# EAGLE board Adapter-CMRI8-line-stall-motor-adapter-array (EAGLE 7.7.0)
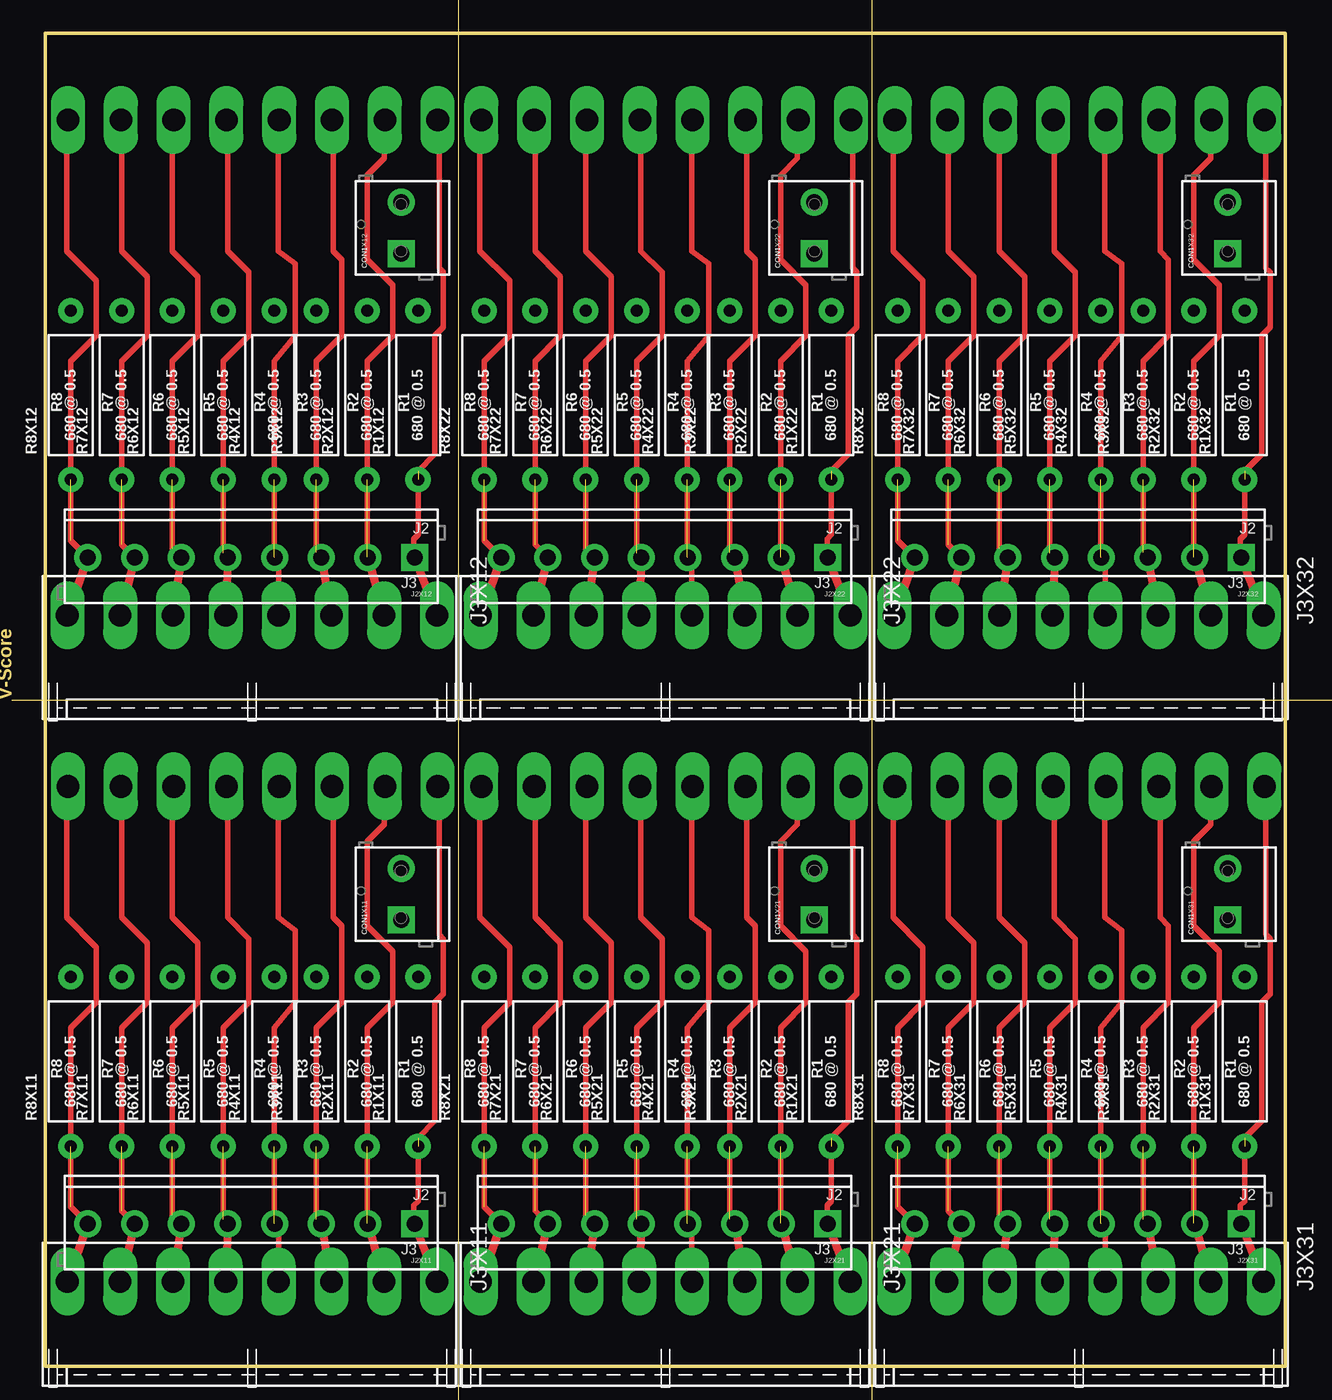
[diagram p0: board, top side]
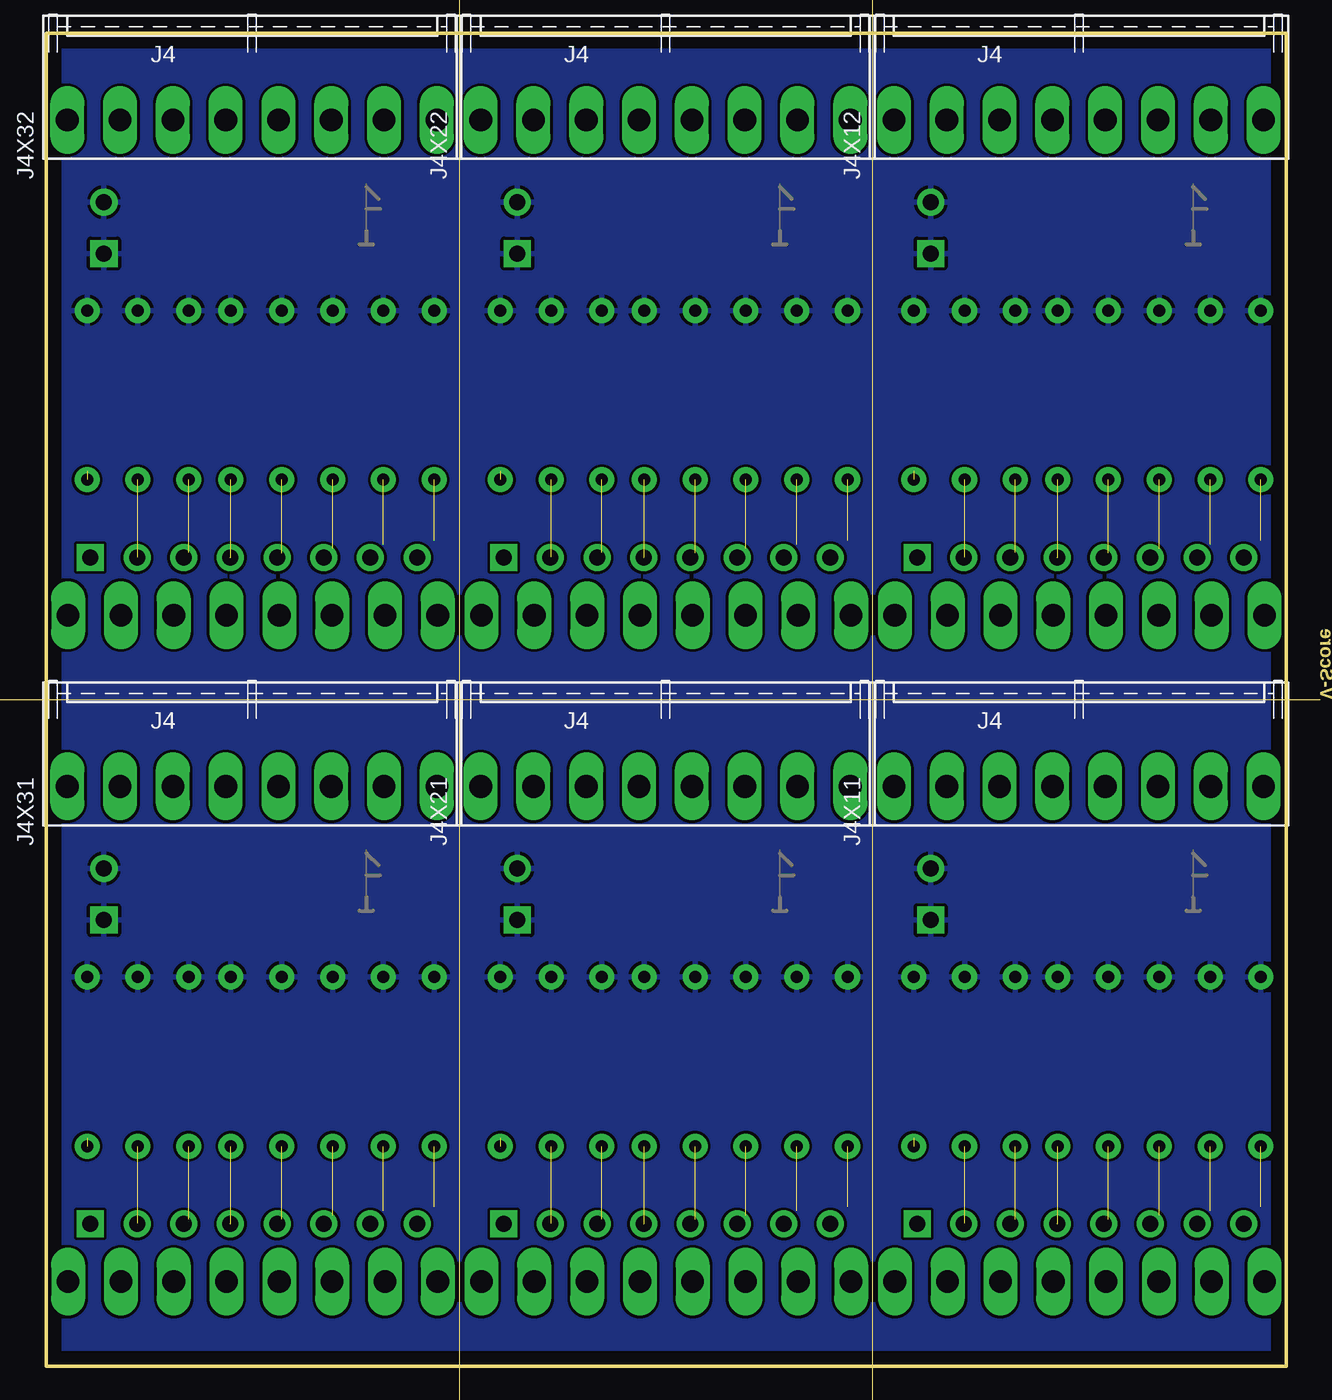
[diagram p1: board, bottom side, seen from below]

Size 93 x 100 mm. Coordinates in mm from the lower left corner, seen from the top.
Outline: 0,0 93,0 93,100 0,100 0,0
Copper layers (1*16): Top 0.035mm / dielectric 1.5mm / Bottom 0.035mm
Design rules "default": minimum track width 10mil, minimum drill 24mil, track to track 8mil, track to pad 8mil, pad to pad 8mil, via to via 8mil, smd to smd 8mil, copper to edge 40mil, drill to drill 8mil, minimum pad ring 10mil, minimum via ring 8mil, stop-mask expansion 4mil, vias tented up to drill 0mil, thermal gap 10mil
Milling: 3 lines

## Footprints (pad centres in the part's own frame; a part is rotated, then mirrored left to right if it is on the bottom)
SCREWTERMINAL-3.5MM-2_LOCK = drill 1.2 pad 2.032 square: 1 -0.178,0 | drill 1.2 pad 2.032: 2 3.678,0
SCREWTERMINAL-3.5MM-8 = drill 1.2 pad 2.032 square: 1 0,0 | drill 1.2 pad 2.032: 2 3.5,0; 3 7,0; 4 10.5,0; 5 14,0; 6 17.5,0; 7 21,0; 8 24.5,0
KK-156-8-F = drill 1.7 pad 2.184 long: 1 -13.86,0; 2 -9.9,0; 3 -5.94,0; 4 -1.98,0; 5 1.98,0; 6 5.94,0; 7 9.9,0; 8 13.86,0
AXIAL-0.5 = drill 0.9 pad 1.88: P$1 -6.35,0; P$2 6.35,0

## Placement (x,y rotation side)
CON1X11  12V  [SCREWTERMINAL-3.5MM-2_LOCK]  26.67,33.66 90 top
CON1X12  12V  [SCREWTERMINAL-3.5MM-2_LOCK]  26.67,83.66 90 top
CON1X21  12V  [SCREWTERMINAL-3.5MM-2_LOCK]  57.67,33.66 90 top
CON1X22  12V  [SCREWTERMINAL-3.5MM-2_LOCK]  57.67,83.66 90 top
CON1X31  12V  [SCREWTERMINAL-3.5MM-2_LOCK]  88.67,33.66 90 top
CON1X32  12V  [SCREWTERMINAL-3.5MM-2_LOCK]  88.67,83.66 90 top
J2X11  3.5mm  [SCREWTERMINAL-3.5MM-8]  27.69,10.67 180 top
J2X12  3.5mm  [SCREWTERMINAL-3.5MM-8]  27.69,60.67 180 top
J2X21  3.5mm  [SCREWTERMINAL-3.5MM-8]  58.69,10.67 180 top
J2X22  3.5mm  [SCREWTERMINAL-3.5MM-8]  58.69,60.67 180 top
J2X31  3.5mm  [SCREWTERMINAL-3.5MM-8]  89.69,10.67 180 top
J2X32  3.5mm  [SCREWTERMINAL-3.5MM-8]  89.69,60.67 180 top
J3X11  Molex Out  [KK-156-8-F]  15.5,6.35 180 top
J3X12  Molex Out  [KK-156-8-F]  15.5,56.35 180 top
J3X21  Molex Out  [KK-156-8-F]  46.5,6.35 180 top
J3X22  Molex Out  [KK-156-8-F]  46.5,56.35 180 top
J3X31  Molex Out  [KK-156-8-F]  77.5,6.35 180 top
J3X32  Molex Out  [KK-156-8-F]  77.5,56.35 180 top
J4X11  Molex In  [KK-156-8-F]  15.56,43.5 0 bottom
J4X12  Molex In  [KK-156-8-F]  15.56,93.5 0 bottom
J4X21  Molex In  [KK-156-8-F]  46.56,43.5 0 bottom
J4X22  Molex In  [KK-156-8-F]  46.56,93.5 0 bottom
J4X31  Molex In  [KK-156-8-F]  77.56,43.5 0 bottom
J4X32  Molex In  [KK-156-8-F]  77.56,93.5 0 bottom
R1X11  680 @ 0.5  [AXIAL-0.5]  27.94,22.86 90 top
R1X12  680 @ 0.5  [AXIAL-0.5]  27.94,72.86 90 top
R1X21  680 @ 0.5  [AXIAL-0.5]  58.94,22.86 90 top
R1X22  680 @ 0.5  [AXIAL-0.5]  58.94,72.86 90 top
R1X31  680 @ 0.5  [AXIAL-0.5]  89.94,22.86 90 top
R1X32  680 @ 0.5  [AXIAL-0.5]  89.94,72.86 90 top
R2X11  680 @ 0.5  [AXIAL-0.5]  24.13,22.86 90 top
R2X12  680 @ 0.5  [AXIAL-0.5]  24.13,72.86 90 top
R2X21  680 @ 0.5  [AXIAL-0.5]  55.13,22.86 90 top
R2X22  680 @ 0.5  [AXIAL-0.5]  55.13,72.86 90 top
R2X31  680 @ 0.5  [AXIAL-0.5]  86.13,22.86 90 top
R2X32  680 @ 0.5  [AXIAL-0.5]  86.13,72.86 90 top
R3X11  680 @ 0.5  [AXIAL-0.5]  20.32,22.86 90 top
R3X12  680 @ 0.5  [AXIAL-0.5]  20.32,72.86 90 top
R3X21  680 @ 0.5  [AXIAL-0.5]  51.32,22.86 90 top
R3X22  680 @ 0.5  [AXIAL-0.5]  51.32,72.86 90 top
R3X31  680 @ 0.5  [AXIAL-0.5]  82.32,22.86 90 top
R3X32  680 @ 0.5  [AXIAL-0.5]  82.32,72.86 90 top
R4X11  680 @ 0.5  [AXIAL-0.5]  17.14,22.86 90 top
R4X12  680 @ 0.5  [AXIAL-0.5]  17.14,72.86 90 top
R4X21  680 @ 0.5  [AXIAL-0.5]  48.15,22.86 90 top
R4X22  680 @ 0.5  [AXIAL-0.5]  48.15,72.86 90 top
R4X31  680 @ 0.5  [AXIAL-0.5]  79.14,22.86 90 top
R4X32  680 @ 0.5  [AXIAL-0.5]  79.14,72.86 90 top
R5X11  680 @ 0.5  [AXIAL-0.5]  13.34,22.86 90 top
R5X12  680 @ 0.5  [AXIAL-0.5]  13.34,72.86 90 top
R5X21  680 @ 0.5  [AXIAL-0.5]  44.34,22.86 90 top
R5X22  680 @ 0.5  [AXIAL-0.5]  44.34,72.86 90 top
R5X31  680 @ 0.5  [AXIAL-0.5]  75.33,22.86 90 top
R5X32  680 @ 0.5  [AXIAL-0.5]  75.33,72.86 90 top
R6X11  680 @ 0.5  [AXIAL-0.5]  9.53,22.86 90 top
R6X12  680 @ 0.5  [AXIAL-0.5]  9.53,72.86 90 top
R6X21  680 @ 0.5  [AXIAL-0.5]  40.52,22.86 90 top
R6X22  680 @ 0.5  [AXIAL-0.5]  40.52,72.86 90 top
R6X31  680 @ 0.5  [AXIAL-0.5]  71.53,22.86 90 top
R6X32  680 @ 0.5  [AXIAL-0.5]  71.53,72.86 90 top
R7X11  680 @ 0.5  [AXIAL-0.5]  5.71,22.86 90 top
R7X12  680 @ 0.5  [AXIAL-0.5]  5.71,72.86 90 top
R7X21  680 @ 0.5  [AXIAL-0.5]  36.72,22.86 90 top
R7X22  680 @ 0.5  [AXIAL-0.5]  36.72,72.86 90 top
R7X31  680 @ 0.5  [AXIAL-0.5]  67.72,22.86 90 top
R7X32  680 @ 0.5  [AXIAL-0.5]  67.72,72.86 90 top
R8X11  680 @ 0.5  [AXIAL-0.5]  1.91,22.86 90 top
R8X12  680 @ 0.5  [AXIAL-0.5]  1.91,72.86 90 top
R8X21  680 @ 0.5  [AXIAL-0.5]  32.91,22.86 90 top
R8X22  680 @ 0.5  [AXIAL-0.5]  32.91,72.86 90 top
R8X31  680 @ 0.5  [AXIAL-0.5]  63.91,22.86 90 top
R8X32  680 @ 0.5  [AXIAL-0.5]  63.91,72.86 90 top
U$1X11  [CA-PROP65WARNING]  19.05,21.59 0 top
U$1X12  [CA-PROP65WARNING]  19.05,71.59 0 top
U$1X21  [CA-PROP65WARNING]  50.05,21.59 0 top
U$1X22  [CA-PROP65WARNING]  50.05,71.59 0 top
U$1X31  [CA-PROP65WARNING]  81.05,21.59 0 top
U$1X32  [CA-PROP65WARNING]  81.05,71.59 0 top
U$2X11  [MRCSLOGOBTM]  0.64,33.66 0 top
U$2X12  [MRCSLOGOBTM]  0.64,83.66 0 top
U$2X21  [MRCSLOGOBTM]  31.64,33.66 0 top
U$2X22  [MRCSLOGOBTM]  31.64,83.66 0 top
U$2X31  [MRCSLOGOBTM]  62.63,33.66 0 top
U$2X32  [MRCSLOGOBTM]  62.63,83.66 0 top

## Library data of the parts
CON1X11 CON1X12 CON1X21 CON1X22 CON1X31 CON1X32 J2X11 J2X12 J2X21 J2X22 J2X31 J2X32 J3X11 J3X12 J3X21 J3X22 J3X31 J3X32 J4X11 J4X12 J4X21 J4X22 J4X31 J4X32 = SPCoast
R1X11 R1X12 R1X21 R1X22 R1X31 R1X32 R2X11 R2X12 R2X21 R2X22 R2X31 R2X32 R3X11 R3X12 R3X21 R3X22 R3X31 R3X32 R4X11 R4X12 R4X21 R4X22 R4X31 R4X32 R5X11 R5X12 R5X21 R5X22 R5X31 R5X32 R6X11 R6X12 R6X21 R6X22 R6X31 R6X32 R7X11 R7X12 R7X21 R7X22 R7X31 R7X32 R8X11 R8X12 R8X21 R8X22 R8X31 R8X32 = SparkFun-Resistors
U$1X11 U$1X12 U$1X21 U$1X22 U$1X31 U$1X32 = MRCS-prop65warningBtm
U$2X11 U$2X12 U$2X21 U$2X22 U$2X31 U$2X32 = MRCSLogoBtm

## Nets
L2X11: J2X11.2 J3X11.2 J4X11.2 R2X11.P$1
L2X12: J2X12.2 J3X12.2 J4X12.2 R2X12.P$1
L2X21: J2X21.2 J3X21.2 J4X21.2 R2X21.P$1
L2X22: J2X22.2 J3X22.2 J4X22.2 R2X22.P$1
L2X31: J2X31.2 J3X31.2 J4X31.2 R2X31.P$1
L2X32: J2X32.2 J3X32.2 J4X32.2 R2X32.P$1
L3X11: J2X11.3 J3X11.3 J4X11.3 R3X11.P$1
L3X12: J2X12.3 J3X12.3 J4X12.3 R3X12.P$1
L3X21: J2X21.3 J3X21.3 J4X21.3 R3X21.P$1
L3X22: J2X22.3 J3X22.3 J4X22.3 R3X22.P$1
L3X31: J2X31.3 J3X31.3 J4X31.3 R3X31.P$1
L3X32: J2X32.3 J3X32.3 J4X32.3 R3X32.P$1
L5X11: J2X11.5 J3X11.5 J4X11.5 R5X11.P$1
L5X12: J2X12.5 J3X12.5 J4X12.5 R5X12.P$1
L5X21: J2X21.5 J3X21.5 J4X21.5 R5X21.P$1
L5X22: J2X22.5 J3X22.5 J4X22.5 R5X22.P$1
L5X31: J2X31.5 J3X31.5 J4X31.5 R5X31.P$1
L5X32: J2X32.5 J3X32.5 J4X32.5 R5X32.P$1
L6X11: J2X11.6 J3X11.6 J4X11.6 R6X11.P$1
L6X12: J2X12.6 J3X12.6 J4X12.6 R6X12.P$1
L6X21: J2X21.6 J3X21.6 J4X21.6 R6X21.P$1
L6X22: J2X22.6 J3X22.6 J4X22.6 R6X22.P$1
L6X31: J2X31.6 J3X31.6 J4X31.6 R6X31.P$1
L6X32: J2X32.6 J3X32.6 J4X32.6 R6X32.P$1
L7X11: J2X11.7 J3X11.7 J4X11.7 R7X11.P$1
L7X12: J2X12.7 J3X12.7 J4X12.7 R7X12.P$1
L7X21: J2X21.7 J3X21.7 J4X21.7 R7X21.P$1
L7X22: J2X22.7 J3X22.7 J4X22.7 R7X22.P$1
L7X31: J2X31.7 J3X31.7 J4X31.7 R7X31.P$1
L7X32: J2X32.7 J3X32.7 J4X32.7 R7X32.P$1
L8X11: J2X11.8 J3X11.8 J4X11.8 R8X11.P$1
L8X12: J2X12.8 J3X12.8 J4X12.8 R8X12.P$1
L8X21: J2X21.8 J3X21.8 J4X21.8 R8X21.P$1
L8X22: J2X22.8 J3X22.8 J4X22.8 R8X22.P$1
L8X31: J2X31.8 J3X31.8 J4X31.8 R8X31.P$1
L8X32: J2X32.8 J3X32.8 J4X32.8 R8X32.P$1
N$1X11: J2X11.1 J3X11.1 J4X11.1 R1X11.P$1
N$1X12: J2X12.1 J3X12.1 J4X12.1 R1X12.P$1
N$1X21: J2X21.1 J3X21.1 J4X21.1 R1X21.P$1
N$1X22: J2X22.1 J3X22.1 J4X22.1 R1X22.P$1
N$1X31: J2X31.1 J3X31.1 J4X31.1 R1X31.P$1
N$1X32: J2X32.1 J3X32.1 J4X32.1 R1X32.P$1
N$8X11: J2X11.4 J3X11.4 J4X11.4 R4X11.P$1
N$8X12: J2X12.4 J3X12.4 J4X12.4 R4X12.P$1
N$8X21: J2X21.4 J3X21.4 J4X21.4 R4X21.P$1
N$8X22: J2X22.4 J3X22.4 J4X22.4 R4X22.P$1
N$8X31: J2X31.4 J3X31.4 J4X31.4 R4X31.P$1
N$8X32: J2X32.4 J3X32.4 J4X32.4 R4X32.P$1
VINX11: CON1X11.1 CON1X11.2 R1X11.P$2 R2X11.P$2 R3X11.P$2 R4X11.P$2 R5X11.P$2 R6X11.P$2 R7X11.P$2 R8X11.P$2
VINX12: CON1X12.1 CON1X12.2 R1X12.P$2 R2X12.P$2 R3X12.P$2 R4X12.P$2 R5X12.P$2 R6X12.P$2 R7X12.P$2 R8X12.P$2
VINX21: CON1X21.1 CON1X21.2 R1X21.P$2 R2X21.P$2 R3X21.P$2 R4X21.P$2 R5X21.P$2 R6X21.P$2 R7X21.P$2 R8X21.P$2
VINX22: CON1X22.1 CON1X22.2 R1X22.P$2 R2X22.P$2 R3X22.P$2 R4X22.P$2 R5X22.P$2 R6X22.P$2 R7X22.P$2 R8X22.P$2
VINX31: CON1X31.1 CON1X31.2 R1X31.P$2 R2X31.P$2 R3X31.P$2 R4X31.P$2 R5X31.P$2 R6X31.P$2 R7X31.P$2 R8X31.P$2
VINX32: CON1X32.1 CON1X32.2 R1X32.P$2 R2X32.P$2 R3X32.P$2 R4X32.P$2 R5X32.P$2 R6X32.P$2 R7X32.P$2 R8X32.P$2

## Tracks (layer width: path | path; a pad name or v marks a point on that pad's centre or on a via)
L2X11  (1 unrouted)
  Top 0.406: J2X11.2 24.13,10.72 24.13,25.4 26.04,27.3 26.04,31.11 24.13,33.02 24.13,39.37 25.4,40.64 25.4,43.44 J4X11.2
  Top 0.61: J2X11.2 J3X11.2
L2X12  (1 unrouted)
  Top 0.406: J2X12.2 24.13,60.72 24.13,75.4 26.04,77.31 26.04,81.11 24.13,83.02 24.13,89.37 25.4,90.64 25.4,93.44 J4X12.2
  Top 0.61: J2X12.2 J3X12.2
L2X21  (1 unrouted)
  Top 0.406: J2X21.2 55.13,10.72 55.13,25.4 57.03,27.3 57.03,31.11 55.13,33.02 55.13,39.37 56.4,40.64 56.4,43.44 J4X21.2
  Top 0.61: J2X21.2 J3X21.2
L2X22  (1 unrouted)
  Top 0.406: J2X22.2 55.13,60.72 55.13,75.4 57.03,77.31 57.03,81.11 55.13,83.02 55.13,89.37 56.4,90.64 56.4,93.44 J4X22.2
  Top 0.61: J2X22.2 J3X22.2
L2X31  (1 unrouted)
  Top 0.406: J2X31.2 86.13,10.72 86.13,25.4 88.03,27.3 88.03,31.11 86.13,33.02 86.13,39.37 87.4,40.64 87.4,43.44 J4X31.2
  Top 0.61: J2X31.2 J3X31.2
L2X32  (1 unrouted)
  Top 0.406: J2X32.2 86.13,60.72 86.13,75.4 88.03,77.31 88.03,81.11 86.13,83.02 86.13,89.37 87.4,90.64 87.4,93.44 J4X32.2
  Top 0.61: J2X32.2 J3X32.2
L3X11  (1 unrouted)
  Top 0.406: J2X11.3 20.32,11.03 20.32,25.4 22.23,27.3 22.23,33.02 21.59,33.66 21.59,43.41 J4X11.3
  Top 0.61: J2X11.3 J3X11.3
L3X12  (1 unrouted)
  Top 0.406: J2X12.3 20.32,61.03 20.32,75.4 22.23,77.31 22.23,83.02 21.59,83.66 21.59,93.41 J4X12.3
  Top 0.61: J2X12.3 J3X12.3
L3X21  (1 unrouted)
  Top 0.406: J2X21.3 51.32,11.03 51.32,25.4 53.23,27.3 53.23,33.02 52.59,33.66 52.59,43.41 J4X21.3
  Top 0.61: J2X21.3 J3X21.3
L3X22  (1 unrouted)
  Top 0.406: J2X22.3 51.32,61.03 51.32,75.4 53.23,77.31 53.23,83.02 52.59,83.66 52.59,93.41 J4X22.3
  Top 0.61: J2X22.3 J3X22.3
L3X31  (1 unrouted)
  Top 0.406: J2X31.3 82.32,11.03 82.32,25.4 84.22,27.3 84.22,33.02 83.59,33.66 83.59,43.41 J4X31.3
  Top 0.61: J2X31.3 J3X31.3
L3X32  (1 unrouted)
  Top 0.406: J2X32.3 82.32,61.03 82.32,75.4 84.22,77.31 84.22,83.02 83.59,83.66 83.59,93.41 J4X32.3
  Top 0.61: J2X32.3 J3X32.3
L5X11  (1 unrouted)
  Top 0.406: J2X11.5 13.34,11.02 13.34,25.4 15.24,27.3 15.24,32.07 13.65,33.66 13.65,43.42 J4X11.5
  Top 0.61: J2X11.5 J3X11.5
L5X12  (1 unrouted)
  Top 0.406: J2X12.5 13.34,61.02 13.34,75.4 15.24,77.31 15.24,82.07 13.65,83.66 13.65,93.42 J4X12.5
  Top 0.61: J2X12.5 J3X12.5
L5X21  (1 unrouted)
  Top 0.406: J2X21.5 44.34,11.02 44.34,25.4 46.24,27.3 46.24,32.07 44.65,33.66 44.65,43.42 J4X21.5
  Top 0.61: J2X21.5 J3X21.5
L5X22  (1 unrouted)
  Top 0.406: J2X22.5 44.34,61.02 44.34,75.4 46.24,77.31 46.24,82.07 44.65,83.66 44.65,93.42 J4X22.5
  Top 0.61: J2X22.5 J3X22.5
L5X31  (1 unrouted)
  Top 0.406: J2X31.5 75.33,11.02 75.33,25.4 77.24,27.3 77.24,32.07 75.65,33.66 75.65,43.42 J4X31.5
  Top 0.61: J2X31.5 J3X31.5
L5X32  (1 unrouted)
  Top 0.406: J2X32.5 75.33,61.02 75.33,75.4 77.24,77.31 77.24,82.07 75.65,83.66 75.65,93.42 J4X32.5
  Top 0.61: J2X32.5 J3X32.5
L6X11  (1 unrouted)
  Top 0.406: J2X11.6 9.53,11.33 9.53,25.4 11.43,27.3 11.43,31.75 9.53,33.66 9.53,43.41 J4X11.6
  Top 0.61: J2X11.6 J3X11.6
L6X12  (1 unrouted)
  Top 0.406: J2X12.6 9.53,61.33 9.53,75.4 11.43,77.31 11.43,81.75 9.53,83.66 9.53,93.41 J4X12.6
  Top 0.61: J2X12.6 J3X12.6
L6X21  (1 unrouted)
  Top 0.406: J2X21.6 40.52,11.33 40.52,25.4 42.43,27.3 42.43,31.75 40.52,33.66 40.52,43.41 J4X21.6
  Top 0.61: J2X21.6 J3X21.6
L6X22  (1 unrouted)
  Top 0.406: J2X22.6 40.52,61.33 40.52,75.4 42.43,77.31 42.43,81.75 40.52,83.66 40.52,93.41 J4X22.6
  Top 0.61: J2X22.6 J3X22.6
L6X31  (1 unrouted)
  Top 0.406: J2X31.6 71.53,11.33 71.53,25.4 73.43,27.3 73.43,31.75 71.53,33.66 71.53,43.41 J4X31.6
  Top 0.61: J2X31.6 J3X31.6
L6X32  (1 unrouted)
  Top 0.406: J2X32.6 71.53,61.33 71.53,75.4 73.43,77.31 73.43,81.75 71.53,83.66 71.53,93.41 J4X32.6
  Top 0.61: J2X32.6 J3X32.6
L7X11  (1 unrouted)
  Top 0.406: J2X11.7 5.71,11.64 5.71,25.4 7.62,27.3 7.62,31.75 5.71,33.66 5.71,43.44 J4X11.7
  Top 0.61: J2X11.7 J3X11.7
L7X12  (1 unrouted)
  Top 0.406: J2X12.7 5.71,61.64 5.71,75.4 7.62,77.31 7.62,81.75 5.71,83.66 5.71,93.44 J4X12.7
  Top 0.61: J2X12.7 J3X12.7
L7X21  (1 unrouted)
  Top 0.406: J2X21.7 36.72,11.64 36.72,25.4 38.62,27.3 38.62,31.75 36.72,33.66 36.72,43.44 J4X21.7
  Top 0.61: J2X21.7 J3X21.7
L7X22  (1 unrouted)
  Top 0.406: J2X22.7 36.72,61.64 36.72,75.4 38.62,77.31 38.62,81.75 36.72,83.66 36.72,93.44 J4X22.7
  Top 0.61: J2X22.7 J3X22.7
L7X31  (1 unrouted)
  Top 0.406: J2X31.7 67.72,11.64 67.72,25.4 69.62,27.3 69.62,31.75 67.72,33.66 67.72,43.44 J4X31.7
  Top 0.61: J2X31.7 J3X31.7
L7X32  (1 unrouted)
  Top 0.406: J2X32.7 67.72,61.64 67.72,75.4 69.62,77.31 69.62,81.75 67.72,83.66 67.72,93.44 J4X32.7
  Top 0.61: J2X32.7 J3X32.7
L8X11  (1 unrouted)
  Top 0.406: J2X11.8 1.91,11.95 1.91,25.4 3.81,27.3 3.81,31.43 1.59,33.66 1.59,43.39 J4X11.8
  Top 0.61: J2X11.8 J3X11.8
L8X12  (1 unrouted)
  Top 0.406: J2X12.8 1.91,61.95 1.91,75.4 3.81,77.31 3.81,81.43 1.59,83.66 1.59,93.39 J4X12.8
  Top 0.61: J2X12.8 J3X12.8
L8X21  (1 unrouted)
  Top 0.406: J2X21.8 32.91,11.95 32.91,25.4 34.81,27.3 34.81,31.43 32.59,33.66 32.59,43.39 J4X21.8
  Top 0.61: J2X21.8 J3X21.8
L8X22  (1 unrouted)
  Top 0.406: J2X22.8 32.91,61.95 32.91,75.4 34.81,77.31 34.81,81.43 32.59,83.66 32.59,93.39 J4X22.8
  Top 0.61: J2X22.8 J3X22.8
L8X31  (1 unrouted)
  Top 0.406: J2X31.8 63.91,11.95 63.91,25.4 65.81,27.3 65.81,31.43 63.59,33.66 63.59,43.39 J4X31.8
  Top 0.61: J2X31.8 J3X31.8
L8X32  (1 unrouted)
  Top 0.406: J2X32.8 63.91,61.95 63.91,75.4 65.81,77.31 65.81,81.43 63.59,83.66 63.59,93.39 J4X32.8
  Top 0.61: J2X32.8 J3X32.8
N$1X11  (1 unrouted)
  Top 0.406: J2X11.1 27.62,10.73 27.62,12.06 27.94,12.38 27.94,17.14 29.21,18.41 29.21,27.3 29.84,27.94 29.84,32.07 29.53,32.38 29.53,43.39 J4X11.1
  Top 0.61: J2X11.1 J3X11.1
N$1X12  (1 unrouted)
  Top 0.406: J2X12.1 27.62,60.73 27.62,62.06 27.94,62.38 27.94,67.14 29.21,68.42 29.21,77.31 29.84,77.94 29.84,82.07 29.53,82.39 29.53,93.39 J4X12.1
  Top 0.61: J2X12.1 J3X12.1
N$1X21  (1 unrouted)
  Top 0.406: J2X21.1 58.62,10.73 58.62,12.06 58.94,12.38 58.94,17.14 60.21,18.41 60.21,27.3 60.84,27.94 60.84,32.07 60.53,32.38 60.53,43.39 J4X21.1
  Top 0.61: J2X21.1 J3X21.1
N$1X22  (1 unrouted)
  Top 0.406: J2X22.1 58.62,60.73 58.62,62.06 58.94,62.38 58.94,67.14 60.21,68.42 60.21,77.31 60.84,77.94 60.84,82.07 60.53,82.39 60.53,93.39 J4X22.1
  Top 0.61: J2X22.1 J3X22.1
N$1X31  (1 unrouted)
  Top 0.406: J2X31.1 89.62,10.73 89.62,12.06 89.94,12.38 89.94,17.14 91.21,18.41 91.21,27.3 91.84,27.94 91.84,32.07 91.53,32.38 91.53,43.39 J4X31.1
  Top 0.61: J2X31.1 J3X31.1
N$1X32  (1 unrouted)
  Top 0.406: J2X32.1 89.62,60.73 89.62,62.06 89.94,62.38 89.94,67.14 91.21,68.42 91.21,77.31 91.84,77.94 91.84,82.07 91.53,82.39 91.53,93.39 J4X32.1
  Top 0.61: J2X32.1 J3X32.1
N$8X11  (2 unrouted)
  Top 0.406: J3X11.4 17.48,10.37 17.14,10.71 17.14,25.4 18.73,27.3 18.73,32.7 17.46,33.66 17.46,43.42 J4X11.4
N$8X12  (2 unrouted)
  Top 0.406: J3X12.4 17.48,60.37 17.14,60.71 17.14,75.4 18.73,77.31 18.73,82.7 17.46,83.66 17.46,93.42 J4X12.4
N$8X21  (2 unrouted)
  Top 0.406: J3X21.4 48.48,10.37 48.15,10.71 48.15,25.4 49.73,27.3 49.73,32.7 48.46,33.66 48.46,43.42 J4X21.4
N$8X22  (2 unrouted)
  Top 0.406: J3X22.4 48.48,60.37 48.15,60.71 48.15,75.4 49.73,77.31 49.73,82.7 48.46,83.66 48.46,93.42 J4X22.4
N$8X31  (2 unrouted)
  Top 0.406: J3X31.4 79.48,10.37 79.14,10.71 79.14,25.4 80.73,27.3 80.73,32.7 79.46,33.66 79.46,43.42 J4X31.4
N$8X32  (2 unrouted)
  Top 0.406: J3X32.4 79.48,60.37 79.14,60.71 79.14,75.4 80.73,77.31 80.73,82.7 79.46,83.66 79.46,93.42 J4X32.4
VINX11
  pour Bottom: 0,0 31.11,0 31.11,50.16 0,50.16
VINX12
  pour Bottom: 0,50 31.11,50 31.11,100.17 0,100.17
VINX21
  pour Bottom: 31,0 62.12,0 62.12,50.16 31,50.16
VINX22
  pour Bottom: 31,50 62.12,50 62.12,100.17 31,100.17
VINX31
  pour Bottom: 62,0 93.11,0 93.11,50.16 62,50.16
VINX32
  pour Bottom: 62,50 93.11,50 93.11,100.17 62,100.17

## Text on the board
Milling: V-Score | V-Score | V-Score
tDocu: CMRI 8 Line Stall / MotorAdapter / V 1.0 20211204 / Seth Neumann | CMRI 8 Line Stall / MotorAdapter / V 1.0 20211204 / Seth Neumann | CMRI 8 Line Stall / MotorAdapter / V 1.0 20211204 / Seth Neumann | 8 | 1 | 8 | 1 | 8 | 1 | 2021.02 | 2021.02 | 2021.02 | v1.0 | v1.0 | v1.0 | 0.100 | 0.100 | 0.100 | 3.5mm | 3.5mm | 3.5mm | 8 | 1 | 8 | 1 | 8 | 1 | 0.156 | 0.156 | 0.156 | CMRI 8 Line Stall / MotorAdapter / V 1.0 20211204 / Seth Neumann | CMRI 8 Line Stall / MotorAdapter / V 1.0 20211204 / Seth Neumann | CMRI 8 Line Stall / MotorAdapter / V 1.0 20211204 / Seth Neumann | 8 | 1 | 8 | 1 | 8 | 1 | 2021.02 | 2021.02 | 2021.02 | v1.0 | v1.0 | v1.0 | 0.100 | 0.100 | 0.100 | 3.5mm | 3.5mm | 3.5mm | 8 | 1 | 8 | 1 | 8 | 1 | 0.156 | 0.156 | 0.156
bDocu: Seth Neumann / John Plocher | Seth Neumann / John Plocher | Seth Neumann / John Plocher | CMRI 8 Line Stall Motor Adapter | CMRI 8 Line Stall Motor Adapter | CMRI 8 Line Stall Motor Adapter | Made in the PCR, Coast Division, NMRA | Made in the PCR, Coast Division, NMRA | Made in the PCR, Coast Division, NMRA | Solder Side | Solder Side | Solder Side | Seth Neumann / John Plocher | Seth Neumann / John Plocher | Seth Neumann / John Plocher | CMRI 8 Line Stall Motor Adapter | CMRI 8 Line Stall Motor Adapter | CMRI 8 Line Stall Motor Adapter | Made in the PCR, Coast Division, NMRA | Made in the PCR, Coast Division, NMRA | Made in the PCR, Coast Division, NMRA | Solder Side | Solder Side | Solder Side
_tNames: CON1 | CON1 | CON1 | R8 | R7 | R6 | R5 | R4 | R3 | R2 | R1 | R8 | R7 | R6 | R5 | R4 | R3 | R2 | R1 | R8 | R7 | R6 | R5 | R4 | R3 | R2 | R1 | J2 | J2 | J2 | J3 | J3 | J3 | CON1 | CON1 | CON1 | R8 | R7 | R6 | R5 | R4 | R3 | R2 | R1 | R8 | R7 | R6 | R5 | R4 | R3 | R2 | R1 | R8 | R7 | R6 | R5 | R4 | R3 | R2 | R1 | J2 | J2 | J2 | J3 | J3 | J3
_bNames: J4 | J4 | J4 | J4 | J4 | J4